# Altium PCB MAIN.PcbDoc
Units mm, origin at the board's own origin, x right, y up, seen from the top; angles counter-clockwise.
Board outline 51.97 x 56.64 mm, 4 copper layers (L1, L2, L3, L4), stack 0.603 mm thick; 28 components, 90 nets, 248 pads, 89 vias.
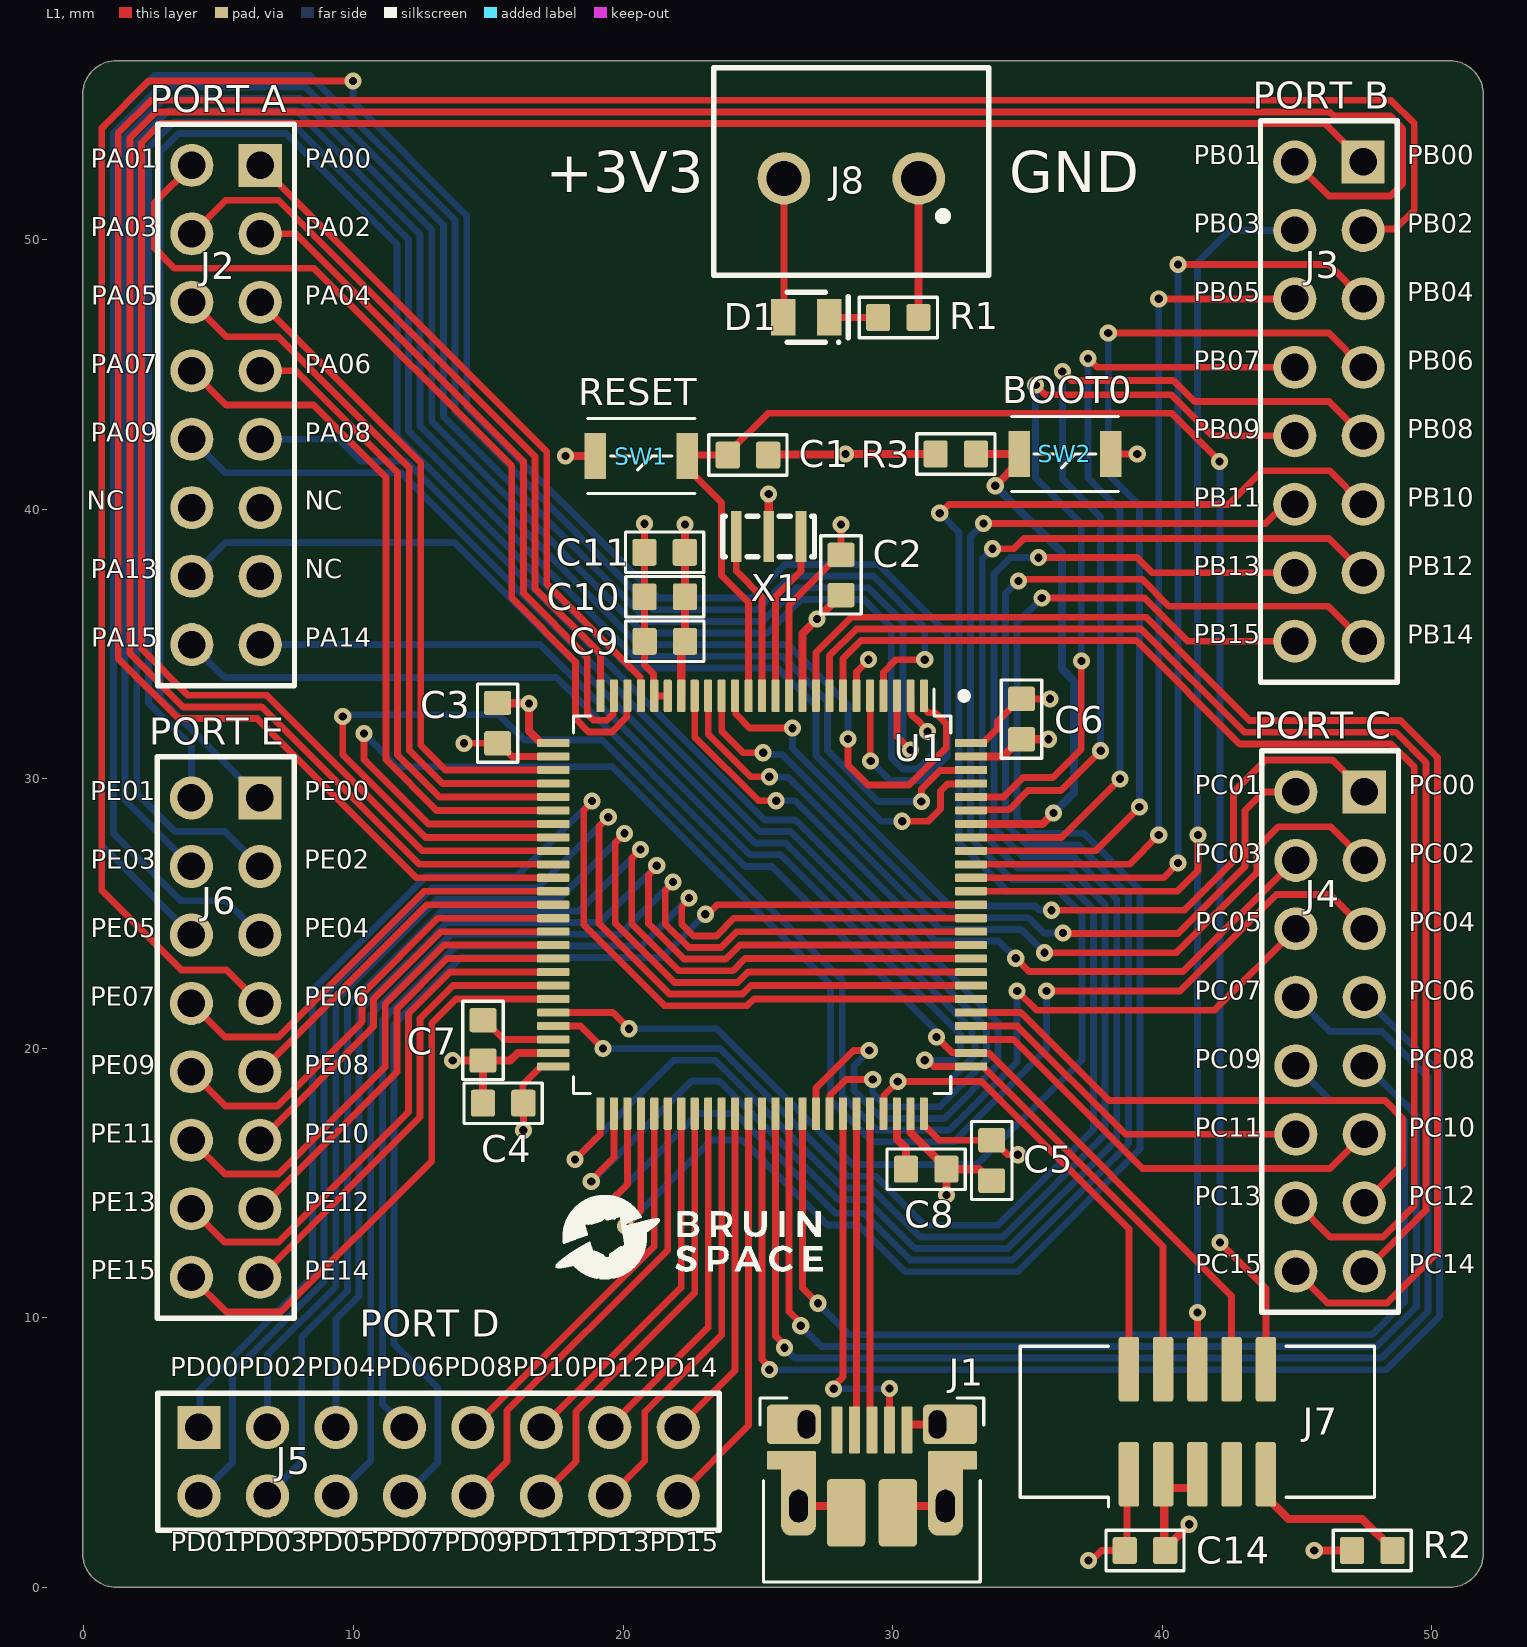
[diagram p0: L1 view]
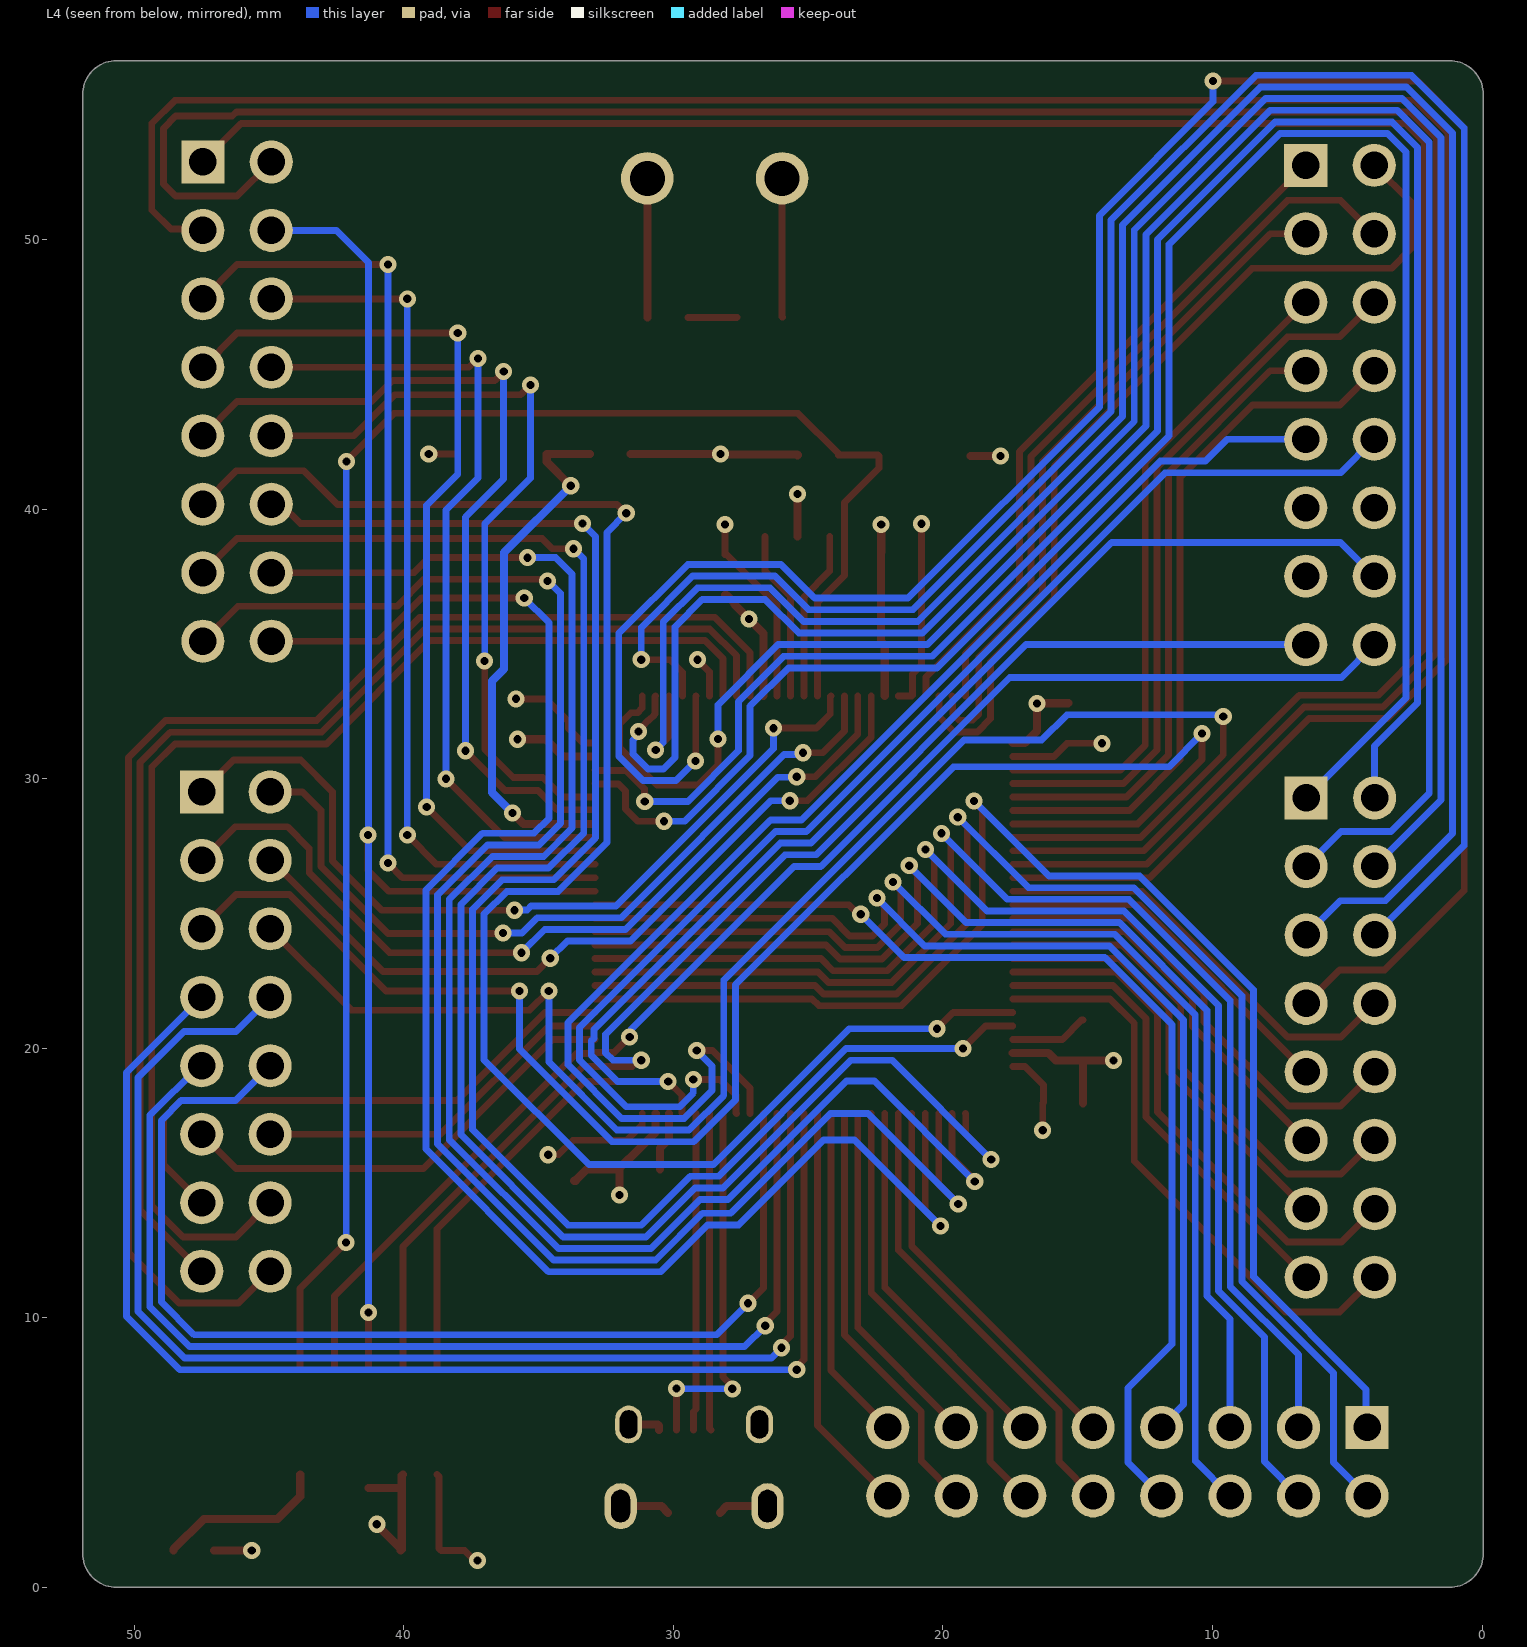
[diagram p1: L4 view, seen from below]
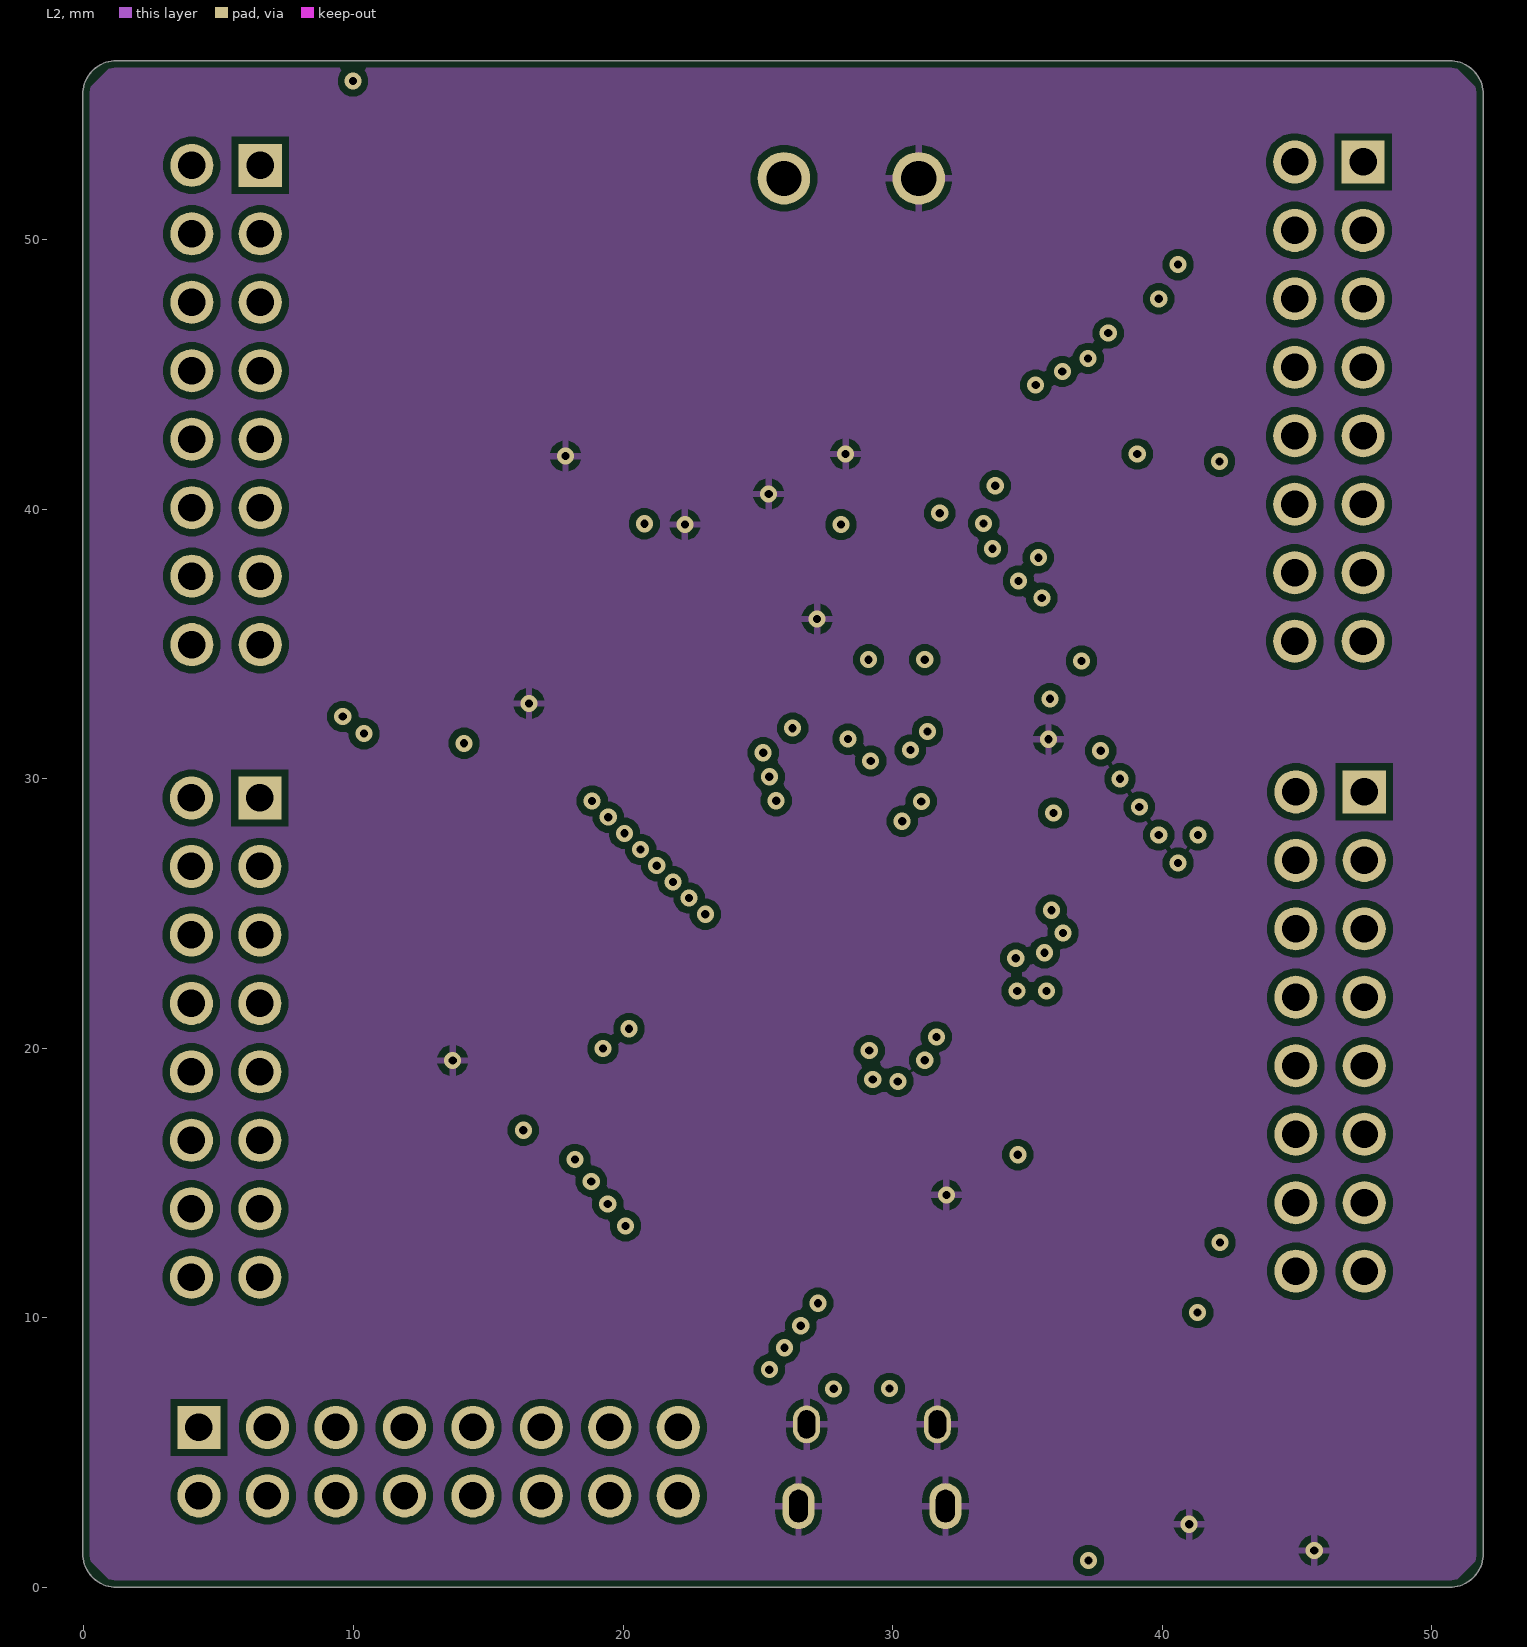
[diagram p2: L2]
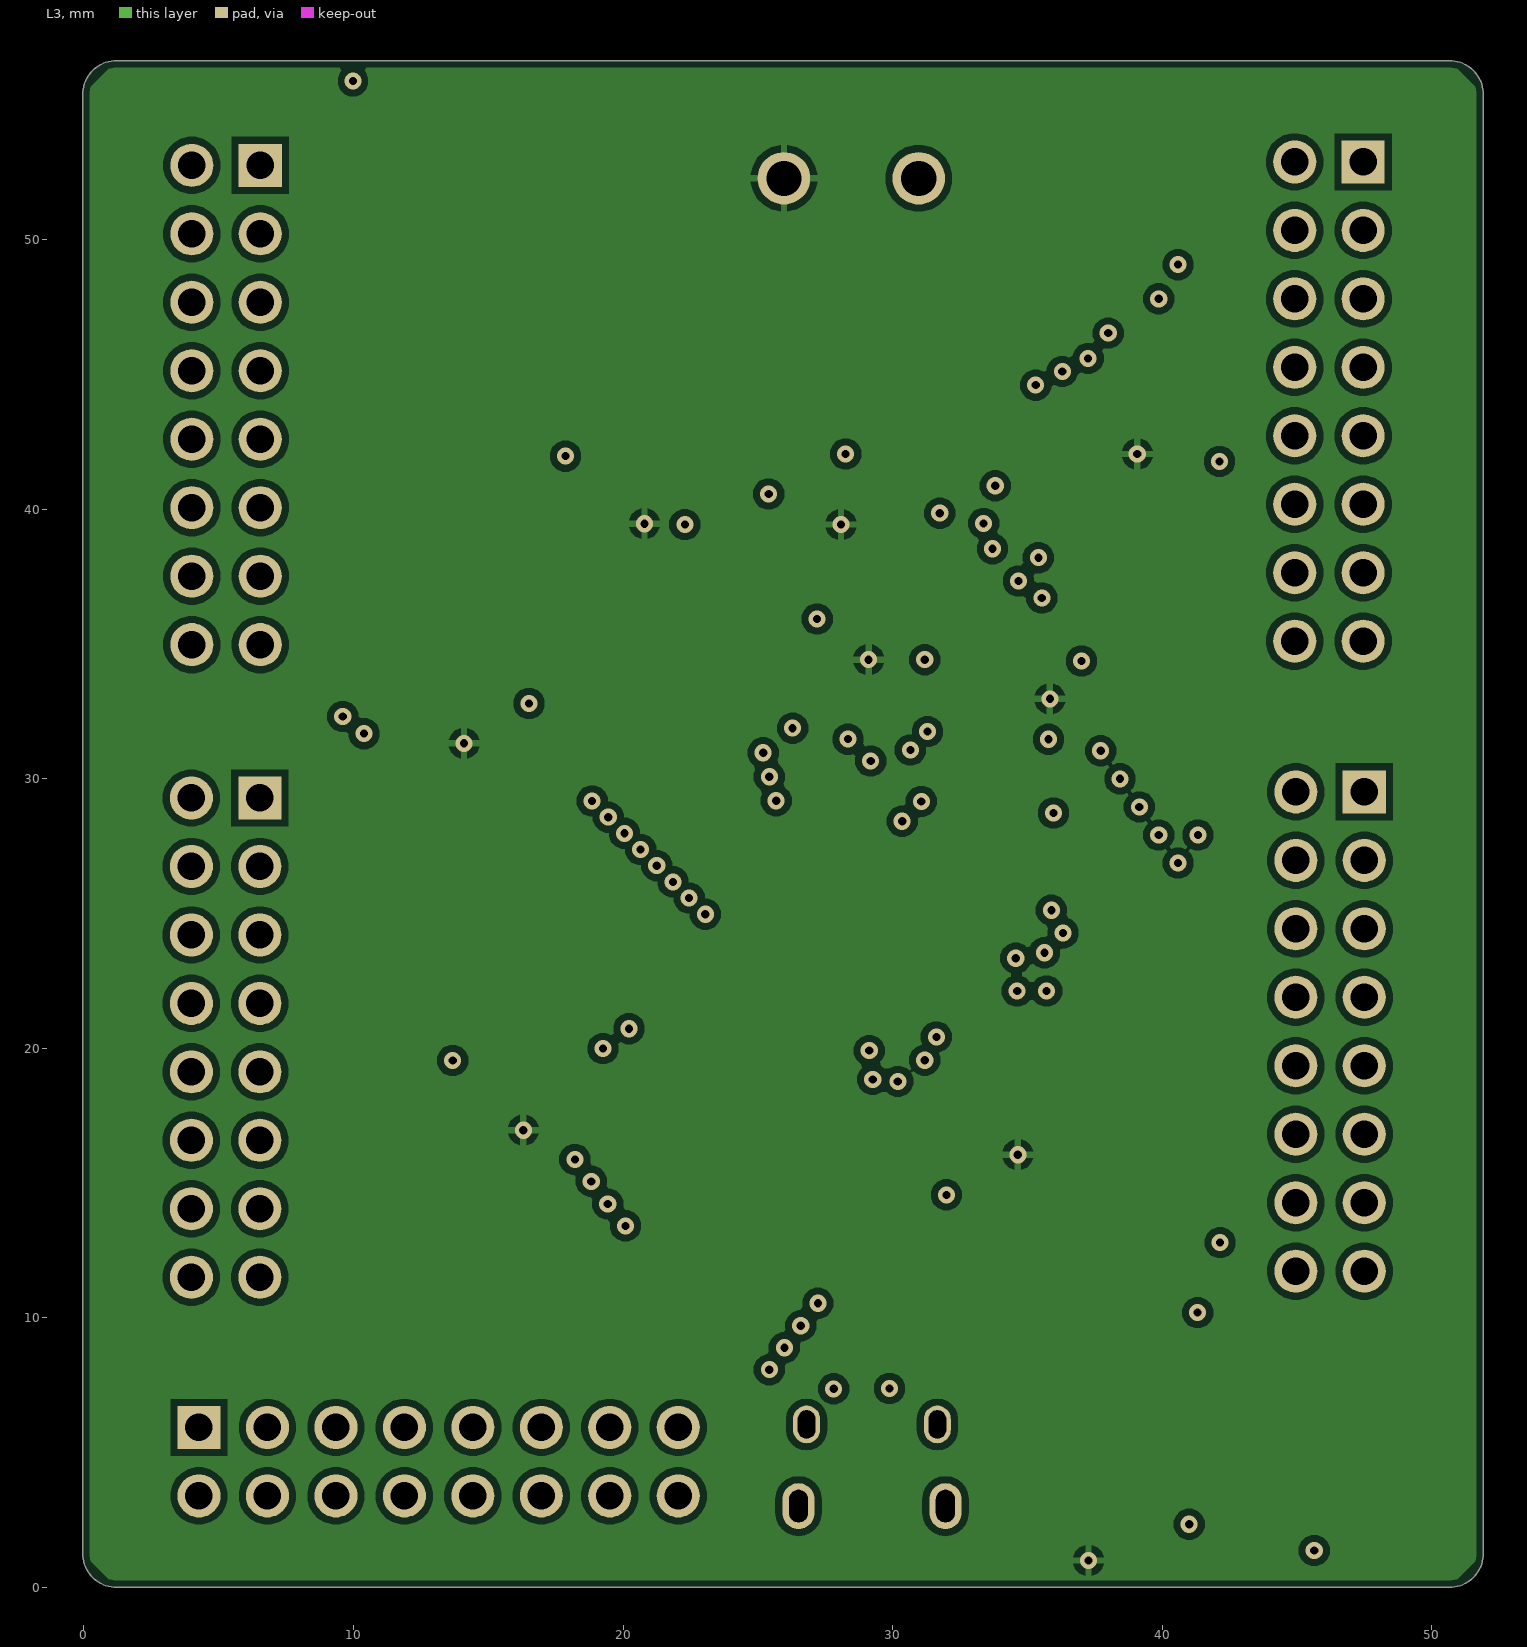
[diagram p3: L3]
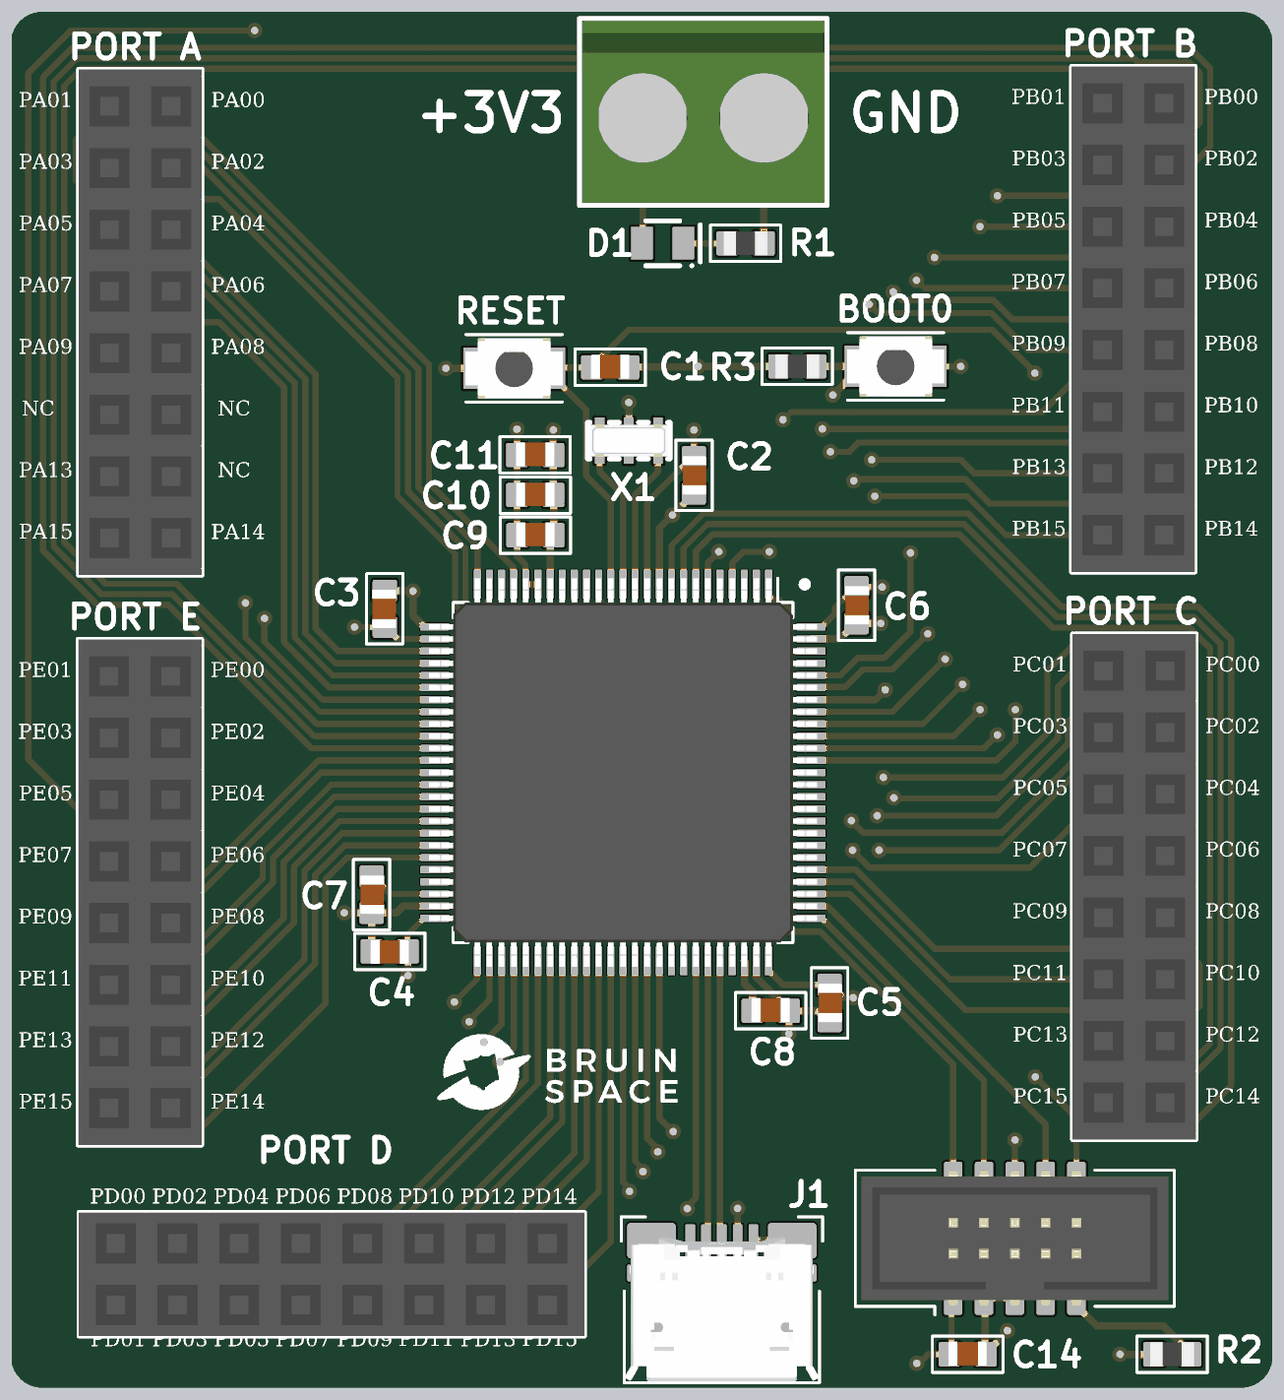
[diagram p4: 3D render of the assembled board from above, using the file's embedded part models]

## Layer stack, top to bottom
Top Solder: solder mask 0.0102, Solder Resist, Dk 3.5
L1: signal copper 0.035
Dielectric 2: prepreg 0.0711, PP-006, Dk 4.1
L2: signal copper 0.0356
Dielectric 1: dielectric 0.32, FR-4, Dk 4.8
L3: signal copper 0.0356
Dielectric 3: prepreg 0.0711, PP-006, Dk 4.1
L4: signal copper 0.035
Bottom Solder: solder mask 0.0102, Solder Resist, Dk 3.5

## Board outline
-0.051,1.27 ccw(c1.219,1.27) 1.219,0 50.648,0 ccw(c50.648,1.27) 51.918,1.27 51.918,55.372 ccw(c50.648,55.372) 50.648,56.642 1.219,56.642 ccw(c1.219,55.372) -0.051,55.372

## Design rules (kind name [scope] priority, off if disabled: settings)
BoardOutlineClearance [All] p1: gap=0.254 ignorepadtopadclearanceinfootprint=FALSE
Clearance [All] p1: gap=0.254 ignorepadtopadclearanceinfootprint=FALSE except(0.178: Track-Track Track-SMDPad SMDPad-SMDPad Via-Via)
DiffPairsRouting [All] p1: maxlimit=12.7 minlimit=0.203 mostfreqgap=0.203 toplayer_minwidth=0.203 toplayer_maxwidth=0.356 toplayer_prefwidth=0.305 midlayer1_minwidth=0.203 midlayer1_maxwidth=0.356 midlayer1_prefwidth=0.305 midlayer2_minwidth=0.203 midlayer2_maxwidth=0.356 midlayer2_prefwidth=0.305 bottomlayer_minwidth=0.203 bottomlayer_maxwidth=0.356 bottomlayer_prefwidth=0.305 maxuncoupledlength=12.7
MinimumSolderMaskSliver [All] p1: minsoldermaskwidth=0.076
PolygonConnect [All] p1: connectstyle=Relief reliefconductorwidth=0.254 reliefentries=4 polygonreliefangle="90 Angle" airgapwidth=0.254
RoutingVias [All] p1: holewidth=0.305 width=0.635 viastyle="Through Hole" minholewidth=0.254 minwidth=0.635 maxholewidth=0.305 maxwidth=0.635
SilkToSolderMaskClearance [IsPad] p1: minsilkscreentomaskgap=0.076 clearancetoexposedcopper=TRUE
SolderMaskExpansion [All] p1: expansion=0.102 istentingtop=FALSE
SupplyNets "Schematic Supply Nets" [InNet('GND')] p1: voltage=0.000
Width [All] p1: maxlimit=12.7 minlimit=0.152 preferedwidth=0.254 minimp=50.000000 maximp=50.000000 favimp=50.000000
27 further rules are at their usual default settings.

## Classes and differential pairs
component class STM32H743_Breakout_V2_TOP: D1 J8 R1
component class MCU1: C1 C2 C3 C4 C5 C6 C7 C8 C9 C10 C11 J1 R3 SW1 SW2 U1 X1
component class CON1: C14 J2 J3 J4 J5 J6 J7 R2
differential pair USB: +USB_P -USB_N

## Components (designator, comment, footprint, x,y, rotation, side; value= is the part's Value field where it differs from the comment)
C1 "C 0603 100nF 10% 50V X7R" C-0603 24.633,42.007 r180 top
C2 "C 0603 100nF 10% 50V X7R" C-0603 28.084,37.561 r90 top
C3 "C 0603 100nF 10% 50V X7R" C-0603 15.346,32.064 r270 top
C4 "C 0603 100nF 10% 50V X7R" C-0603 15.55,17.962 r0 top
C5 "C 0603 100nF 10% 50V X7R" C-0603 33.676,15.837 r90 top
C6 "C 0603 100nF 10% 50V X7R" C-0603 34.783,32.214 r90 top
C7 "C 0603 100nF 10% 50V X7R" C-0603 14.804,20.295 r90 top
C8 "C 0603 100nF 10% 50V X7R" C-0603 31.245,15.515 r180 top
C9 "C 0603 100nF 10% 50V X7R" C-0603 21.55,35.098 r180 top
C10 "C 0603 1µF 10% 50V X5R" C-0603 21.546,36.751 r180 top
C11 "C 0603 4.7µF 10% 16V X5R" C-0603 21.542,38.4 r180 top
C14 "C 0603 100nF 10% 50V X7R" C-0603 39.363,1.368 r180 top
D1 "KT-0805G" HubeiKENTO_0805 26.797,47.118 r180 top
J1 "10103594-0001LF" 10103594-0001LF 29.234,4.407 r0 top
J2 "SULLINS_PPPC082LFBN-RC" 2.54_08x02_female_header 5.272,43.866 r270 top
J3 "SULLINS_PPPC082LFBN-RC" 2.54_08x02_female_header 46.187,43.993 r270 top
J4 "SULLINS_PPPC082LFBN-RC" 2.54_08x02_female_header 46.228,20.622 r270 top
J5 "SULLINS_PPPC082LFBN-RC" 2.54_08x02_female_header 13.157,4.664 r0 top
J6 "SULLINS_PPPC082LFBN-RC" 2.54_08x02_female_header 5.255,20.396 r270 top
J7 "20021521-00010T1LF" 20021521-00010T1LF 41.306,6.143 r0 top
J8 "691137710002" 691137710002 28.469,52.275 r180 top
R1 "R 0603 100 1% 0.100W 200PPM" R-0603 30.211,47.113 r180 top
R2 "R 0603 100 1% 0.100W 100PPM" R-0603 47.792,1.368 r0 top
R3 "R 0603 10k 1% 0.100W 100PPM" R-0603 32.344,42.049 r0 top
SW1 "B3U-1000P" B3U-1000P 20.676,41.969 r180 top
SW2 "B3U-1000P" B3U-1000P 36.395,42.048 r180 top
U1 "STM32H743VIT6" "STM LQFP-100" 25.158,25.326 r180 top
X1 "MURATA_CSTNE16M0V53C000R0" MURATA_CSTNE16M0V53C000R0-Footprint-1 25.401,38.989 r180 top

## Footprints (in the part's own frame and the unit in brackets; to place one, negate y for a bottom-side part, rotate by r counter-clockwise, add the part's x,y. Pads: shape width x height; smd on the part's side, far side on the other; paste and mask are expansions set on the pad)
2.54_08x02_female_header [mm]
  rect 1.6x1.6 hole 1.02: 1(-8.89,1.27)
  round 1.6 hole 1.02: 2(-8.89,-1.27) 3(-6.35,1.27) 4(-6.35,-1.27) 5(-3.81,1.27) 6(-3.81,-1.27) 7(-1.27,1.27) 8(-1.27,-1.27) 9(1.27,1.27) 10(1.27,-1.27) 11(3.81,1.27) 12(3.81,-1.27) 13(6.35,1.27) 14(6.35,-1.27) 15(8.89,1.27) 16(8.89,-1.27)
  silkscreen extent -10.41,-2.54 10.41,2.54, body extent -10.41,-2.54 10.41,2.54, height 8.51
10103594-0001LF [mm] "USB 2.0 Micro-B, 5 leads, Through-Hole, Right Angle, 4 MH, 2 MP"
  rrect20% 0.4x1.75 smd mask+0.08: 1(-1.3,1.435) 2(-0.65,1.435) 3(0,1.435) 4(0.65,1.435) 5(1.3,1.435)
  rrect20% 2x1.46 smd mask+0.08: MH1(-2.9,1.64) MH4(2.9,1.64)
  oval 1x1.4 hole 0.65 slot 1.05 at 90 deg mask+0.08: MH1(-2.425,1.64) MH4(2.425,1.64)
  rrect20% 1.825x0.7 smd mask+0.08: MH2(-2.987,0.31) MH3(2.987,0.31)
  oval 1.2x1.7 hole 0.7 slot 1.2 at 90 deg mask+0.08: MH2(-2.725,-1.39) MH3(2.725,-1.39)
  rrect60% 1.3x3.15 smd mask+0.08: MH2(-2.725,-0.915) MH3(2.725,-0.915)
  rrect20% 1.425x2.5 smd mask+0.08: MP1(-0.962,-1.64) MP2(0.962,-1.64)
  silkscreen extent -4.15,-4.21 4.15,2.62, body extent -4.02,-4.15 4.02,1.88, height 2.9
20021521-00010T1LF [mm] "SWD Box Header 10-Pos SMD 1.27mm Pitch Shrouded"
  rrect25% 0.76x2.4 smd: 1(-2.54,-1.95) 2(-2.54,1.95) 3(-1.27,-1.95) 4(-1.27,1.95) 5(0,-1.95) 6(0,1.95) 7(1.27,-1.95) 8(1.27,1.95) 9(2.54,-1.95) 10(2.54,1.95)
  silkscreen extent -6.58,-3.15 6.58,2.8, body extent -6.32,-2.75 6.32,2.75, height 5.61
691137710002 [mm]
  round 1.95 hole 1.3: 1(-2.5,0) 2(2.5,0)
  silkscreen extent -5.1,-4.1 5.1,3.6, body extent -5,-4 5,3.5, height 11.5
B3U-1000P [mm] "SPST-NO Tactile Switch, SMD, 3.0x2.5x1.6(mm)"
  rect 0.8x1.7 smd: 1(1.7,0) 2(-1.7,0)
  silkscreen extent -1.98,-1.39 1.98,1.39, body extent -2,-1.25 2,1.25, height 1.75
C-0603 [mm] "Capacitor, 0603"
  rrect20% 0.9x1 smd: 1(-0.75,0) 2(0.75,0)
  silkscreen extent -1.45,-0.75 1.45,0.75, body extent -0.8,-0.53 0.8,0.48, height 0.81
HubeiKENTO_0805 [mm] "Molded Diode, 2-Leads, Body 2.00x1.25mm, IPC High Density"
  rect 0.9x1.35 smd: 1(-0.85,0) 2(0.85,0)
  silkscreen extent -1.55,-0.92 0.7,0.97, body extent -1,-0.63 1,0.63, height 0.8
MURATA_CSTNE16M0V53C000R0-Footprint-1 [mm]
  rect 0.4x1.9 smd: 1(-1.2,0) 2(0,0) 3(1.2,0)
  silkscreen extent -1.7,-0.75 1.7,0.75, body extent -1.6,-0.65 1.6,0.65, height 1
R-0603 [mm] "Resistor, 0603"
  rrect20% 0.9x1 smd: 1(-0.75,0) 2(0.75,0)
  silkscreen extent -1.45,-0.75 1.45,0.75, body extent -0.9,-0.5 0.9,0.5, height 0.57
"STM LQFP-100" [mm]
  rrect25% 0.3x1.2 smd mask+0.05: 1(-6,-7.75) 2(-5.5,-7.75) 3(-5,-7.75) 4(-4.5,-7.75) 5(-4,-7.75) 6(-3.5,-7.75) 7(-3,-7.75) 8(-2.5,-7.75) 9(-2,-7.75) 10(-1.5,-7.75) 11(-1,-7.75) 12(-0.5,-7.75) 13(0,-7.75) 14(0.5,-7.75) 15(1,-7.75) 16(1.5,-7.75) 17(2,-7.75) 18(2.5,-7.75) 19(3,-7.75) 20(3.5,-7.75) 21(4,-7.75) 22(4.5,-7.75) 23(5,-7.75) 24(5.5,-7.75) 25(6,-7.75) 51(6,7.75) 52(5.5,7.75) 53(5,7.75) 54(4.5,7.75) 55(4,7.75) 56(3.5,7.75) 57(3,7.75) 58(2.5,7.75) 59(2,7.75) 60(1.5,7.75) 61(1,7.75) 62(0.5,7.75) 63(0,7.75) 64(-0.5,7.75) 65(-1,7.75) 66(-1.5,7.75) 67(-2,7.75) 68(-2.5,7.75) 69(-3,7.75) 70(-3.5,7.75) 71(-4,7.75) 72(-4.5,7.75) 73(-5,7.75) 74(-5.5,7.75) 75(-6,7.75)
  rrect25% 1.2x0.3 smd mask+0.05: 26(7.75,-6) 27(7.75,-5.5) 28(7.75,-5) 29(7.75,-4.5) 30(7.75,-4) 31(7.75,-3.5) 32(7.75,-3) 33(7.75,-2.5) 34(7.75,-2) 35(7.75,-1.5) 36(7.75,-1) 37(7.75,-0.5) 38(7.75,0) 39(7.75,0.5) 40(7.75,1) 41(7.75,1.5) 42(7.75,2) 43(7.75,2.5) 44(7.75,3) 45(7.75,3.5) 46(7.75,4) 47(7.75,4.5) 48(7.75,5) 49(7.75,5.5) 50(7.75,6) 76(-7.75,6) 77(-7.75,5.5) 78(-7.75,5) 79(-7.75,4.5) 80(-7.75,4) 81(-7.75,3.5) 82(-7.75,3) 83(-7.75,2.5) 84(-7.75,2) 85(-7.75,1.5) 86(-7.75,1) 87(-7.75,0.5) 88(-7.75,0) 89(-7.75,-0.5) 90(-7.75,-1) 91(-7.75,-1.5) 92(-7.75,-2) 93(-7.75,-2.5) 94(-7.75,-3) 95(-7.75,-3.5) 96(-7.75,-4) 97(-7.75,-4.5) 98(-7.75,-5) 99(-7.75,-5.5) 100(-7.75,-6)
  silkscreen extent -7.62,-8 7,7, body extent -8,-8 8,8, height 1.46

## Part data
C1 C2 C3 C4 C5 C6 C7 C8 C9 C14: library part CMP-00008-4, "SMD Capacitor, Ceramic", Capacitance=100nF, Case/Package=0603, Dielectric=X7R, Dielectric Material=Ceramic, LCSC P/N=C14663, Max Operating Temperature=125°C, Min Operating Temperature=-55°C, Tolerance=10%, Voltage=50V, RoHS=Yes
C10: library part CMP-00039-2, "SMD Capacitor, Ceramic", Capacitance=1µF, Case/Package=0603, Dielectric=X5R, Dielectric Material=Ceramic, LCSC P/N=C15849, Max Operating Temperature=85°C, Min Operating Temperature=-55°C, Tolerance=10%, Voltage=50V, RoHS=Yes
C11: library part CMP-00010-4, "SMD Capacitor, Ceramic", Capacitance=4.7µF, Case/Package=0603, Dielectric=X5R, Dielectric Material=Ceramic, LCSC P/N=C19666, Max Operating Temperature=85°C, Min Operating Temperature=-55°C, Tolerance=10%, Voltage=16V, RoHS=Yes
D1: library part CMP-00081-2, "Green 520nm LED 2.8V 0805", Case/Package=0805, Color=Green, Forward Voltage=2.8V, LCSC P/N=C2297, Lens Color=Colorless, Max Operating Temperature=85°C, Maximum Forward Current=20mA, Min Operating Temperature=-40°C, Digikey P/N=846-SMLMN2ECTT86CCT-ND, Luminous Intensity=230mcd, Test Current=20mA, Wavelength=520nm
J1: library part CMP-00017-5, "USB 2.0 Micro-B, 5 leads, Through-Hole, Right Angle", Current Rating Per Contact=1.8A, Max Operating Temperature=80°C, Min Operating Temperature=-30°C, Voltage Rating (AC)=100V, Connector Type=Receptacle, Mount=Through-Hole, Number of Contacts=5, Orientation="Right Angle", RoHS=Yes
J2 J3 J4 J5 J6: library part CMP-00121-1, "2.54mm pitch 8x2 female pin header", Digikey P/N=S7111-ND
J7: library part CMP-00019-7, "1.27mm Pitch Micro Header, 2x5Pos SMD, Shrouded, SWD/JTAG", Current Rating Per Contact=1A, Max Operating Temperature=105°C, Min Operating Temperature=-40°C, Voltage Rating (AC)=125V, Connector Type="Header, SWD/JTAG", Digikey P/N=609-4054-ND, Mount=SMD, Number of Contacts=10, Orientation=Straight, RoHS=Yes, Voltage Rating (DC)=125V
J8: library part CMP-009-000000-2, "2 Position Wire to Board Terminal Block Horizontal with Board 0.197 (5.00mm) Through Hole", Package=None, Availability="In Stock", Check_prices=https://www.snapeda.com/parts/691137710002/Wurth+Electronics+Inc./view-part/?ref=eda, Component Type=Standard, Design Item ID=691137710002, MF="Wurth Electronics", MP=691137710002, Pin Count=2, Price=None, SnapEDA_Link=https://www.snapeda.com/parts/691137710002/Wurth+Electronics+Inc./view-part/?ref=snap, Source=691137710002.SchLib
R1: library part CMP-00095-2, "SMD Resistor, Thick Film", Case/Package=0603, LCSC P/N=C22775, Max Operating Temperature=155°C, Min Operating Temperature=-55°C, Power Rating=100mW, Resistance=100, Temperature Coefficient=200ppm, Tolerance=1%, Voltage Rating=75V, Composition="Thick Film", RoHS=Yes
R2: library part CMP-00095-1, "SMD Resistor, Thick Film", Case/Package=0603, LCSC P/N=C25804, Max Operating Temperature=155°C, Min Operating Temperature=-55°C, Power Rating=100mW, Resistance=10k, Temperature Coefficient=100ppm, Tolerance=1%, Voltage Rating=75V, Composition="Thick Film", RoHS=Yes
R3: library part CMP-00021-6, "SMD Resistor, Thick Film", Case/Package=0603, LCSC P/N=C25804, Max Operating Temperature=155°C, Min Operating Temperature=-55°C, Power Rating=100mW, Resistance=10k, Temperature Coefficient=100ppm, Tolerance=1%, Voltage Rating=75V, Composition="Thick Film", RoHS=Yes
SW1 SW2: library part CMP-00117-2, "Tactile Switch, SPST-NO, 0.05A @ 12VDC, SMD", Case/Package=SMD, LCSC P/N=C231329, Max Operating Temperature=70°C, Min Operating Temperature=-25°C, Voltage Rating (AC)=250V, Voltage Rating (DC)=12V, Digikey P/N=SW1020CT-ND, Mount=SMD, Pins=2, RoHS=Yes
U1: library part CMP-00101-4, "MCU 32-bit ARM Cortex M7 2MB Flash 3.3V 100-Pin LQFP"
X1: library part CMP-00120-1, "Ceramic Resonator 16MHz 15pF SMD", Capacitance=15p, Frequency=16MHz, LCSC P/N=C882606, Digikey P/N=490-17949-1-ND, Impedance=40, Pins=3

## Via types
v1: diameter 0.635, hole 0.305, L1 to L4, tented both sides, 89 vias

## Nets (pads, with @x,y where several pads share a name; then routed paths per layer and width w, separated by ;. In a path a pad name is that pad's centre, name@x,y a point inside that pad or via, vN(x,y) a via of type N, cw(c..) or ccw(c..) an arc to the next point about the centre after c; other vN are vias at no path point)
BOOT0: R3.2 SW2.1 U1.94 | length 20
  L1 w0.305: U1.94 35.565,28.326 v1(35.966,28.727) ; R3.2 34.694,42.049 34.695,41.756 v1(33.807,40.869)
  L4 w0.305: v1(33.807,40.869) 36.284,38.392 36.284,34.066 36.728,33.622 36.728,29.489 v1(35.966,28.727)
GND: C1.1 C2.1 C3.1 C4.1 C5.1 C6.1 C7.1 C8.1 C9.1 C10.1 C11.1 C14.1 J1.5 J1.MH1 J1.MH2 J1.MH3 J1.MH4 J1.MP1 J1.MP2 J7.3 J7.5 J8.1 R1.1 R2.1 R3.1 SW1.1 U1.10 U1.19 U1.26 U1.49 U1.74 U1.99 X1.2 | length 54
  L1 w0.305: v1(13.678,19.545) C7.1 ; C4.1 C4.1 14.802,19.543 C7.1 ; C3.1@15.346,32.814 15.357,32.803 16.499,32.803 v1(16.51,32.791) 16.51,31.779 16.963,31.326 U1.26 ; U1.49 16.092,19.826 15.811,19.545 C7.1 ; v1(17.865,41.969) SW1.1 ; U1.19 22.16,33.078 22.16,34.959 C9.1 22.298,35.1 22.298,36.749 C10.1 22.294,36.753 22.294,38.399 C11.1 v1(22.292,39.43) ; v1@25.392,40.572 v1(25.401,40.563) X1.2 ; C1.1@25.392,41.998 C1.1 25.403,42.028 28.236,42.028 v1(28.256,42.049) R3.1 ; J1.MH2@26.509,3.017 28.022,3.017 J1.MP1 ; U1.10 26.658,35.381 26.662,35.386 26.662,35.39 27.736,36.464 27.736,36.514 28.034,36.811 C2.1 ; J1.MP2 30.446,3.017 J1.MH3@31.959,3.017 ; J1.5 30.534,5.999 30.582,6.047 J1.MH4@31.659,6.047 ; U1.74 30.66,17.573 30.66,16.878 31.676,15.863 31.698,15.863 31.995,15.565 C8.1 ; R1.1 30.965,47.117 30.965,52.271 J8.1 ; v1(31.995,14.563) C8.1 ; U1.99 34.095,30.826 34.733,31.464 C6.1 v1(35.782,31.464) ; C5.1 33.626,15.087 33.198,15.515 C8.1 ; J7.3 40.075,4.155 J7.3@40.075,3.685 ; C14.1@40.075,1.407 J7.3@40.075,3.685 ; C14.1 40.113,1.418 41.001,2.307 v1(41.001,2.343) ; J7.5@41.306,3.685 J7.3@40.075,3.685 ; v1(45.641,1.368) R2.1
  other v1: 27.199,35.927
MCU_VCC: C2.2 C3.2 C4.2 C5.2 C6.2 C9.2 C10.2 C11.2 C14.2 D1.2 J7.1 J8.2 SW2.2 U1.6 U1.11 U1.20 U1.21 U1.27 U1.50 U1.75 U1.100 | length 41
  L1 w0.254: v1(14.101,31.314) 15.396,31.314 15.884,30.826 U1.27 ; v1(16.3,16.961) C4.2 16.276,17.987 16.276,18.644 16.958,19.326 U1.50 ; v1(20.792,39.461) C11.2 20.794,38.399 20.794,36.753 C10.2 20.798,36.749 20.798,35.1 C9.2 20.8,34.217 21.135,33.883 21.135,33.099 U1.21 U1.20 ; D1.2 25.969,47.14 J8.2 ; U1.11 26.158,36.431 26.162,36.436 26.162,36.44 C2.2@28.034,38.311 ; C2.2 v1(28.084,39.43) ; U1.6 28.658,33.967 v1(29.108,34.417) ; U1.75 31.158,17.126 31.181,17.103 31.218,17.103 31.734,16.587 C5.2 33.726,16.587 34.26,16.053 v1(34.646,16.053) ; U1.100 33.358,31.326 33.895,31.863 33.895,32.126 34.733,32.964 C6.2 v1(35.834,32.964) ; v1(37.268,0.996) 37.371,0.996 37.743,1.368 C14.2 38.69,1.445 38.69,4.117 J7.1 ; SW2.2 v1(39.076,42.048)
NetC7_2: C7.2 U1.48 | length 2.9
  L1 w0.254: C7.2 14.854,21.045 15.573,20.326 U1.48
NetC8_2: C8.2 U1.73 | length 2.2
  L1 w0.305: U1.73 30.16,17.573 30.16,16.626 30.493,16.294 30.493,15.517 C8.2
NetD1_1: D1.1 R1.2 | length 1.8
  L1 w0.254: D1.1 27.652,47.113 R1.2
NetJ7_9: J7.9 R2.2 | length 6.4
  L1 w0.305: J7.9 43.846,3.373 44.679,2.54 47.421,2.54 48.542,1.418 R2.2
NetU1_12: U1.12 X1.1 | length 6.3
  L1 w0.254: U1.12 25.658,36.758 26.601,37.701 X1.1
NetU1_13: U1.13 X1.3 | length 6.3
  L1 w0.254: X1.3 24.201,37.699 25.158,36.742 U1.13
NRST: C1.2 J7.10 SW1.2 U1.14 | length 65.4
  L1 w0.254: U1.14 24.658,36.531 23.647,37.541 23.647,40.247 22.376,41.519 SW1.2 22.414,42.007 C1.2 23.882,42.057 25.383,43.558 40.366,43.558 42.127,41.796 v1(42.127,41.772) ; v1(42.148,12.792) 43.846,11.094 J7.10
  L4 w0.254: v1@42.139,12.802 v1@42.139,41.785
PA0: J2.1 U1.22 | length 25.5
  L1 w0.254: J2.1 17.166,42.131 17.166,37.241 20.635,33.772 20.635,33.099 U1.22
PA1: J2.2 U1.23 | length 33.7
  L1 w0.254: J2.2 2.616,51.371 2.616,49.682 3.363,48.936 8.53,48.936 15.871,41.595 15.871,36.704 18.237,34.338 18.237,32.227 18.725,31.739 19.591,31.739 20.135,32.283 20.135,33.053 U1.23
PA2: J2.3 U1.24 | length 25.5
  L1 w0.254: J2.3 7.86,50.216 16.303,41.774 16.303,36.883 18.669,34.517 18.669,32.406 18.904,32.171 19.412,32.171 19.635,32.394 19.635,33.053 U1.24
PA3: J2.4 U1.25 | length 27.1
  L1 w0.254: J2.4 5.246,51.46 7.226,51.46 16.734,41.952 16.734,37.062 19.158,34.638 U1.25
PA4: J2.5 U1.28 | length 24.2
  L1 w0.254: J2.5 12.497,41.721 12.497,31.242 13.413,30.326 U1.28
PA5: J2.6 U1.29 | length 26.9
  L1 w0.254: J2.6 5.283,46.395 7.212,46.395 12.065,41.542 12.065,31.063 13.302,29.826 U1.29
PA6: J2.7 U1.30 | length 23.6
  L1 w0.254: J2.7 7.86,45.136 11.633,41.363 11.633,30.884 13.192,29.326 U1.30
PA7: J2.8 U1.31 | length 26.3
  L1 w0.254: J2.8 5.272,43.866 8.52,43.866 11.201,41.184 11.201,30.705 13.081,28.826 U1.31
PA8: J2.9 U1.67 | length 49.7
  L1 w0.254: U1.67 27.158,18.522 28.55,19.914 v1(29.134,19.914)
  L4 w0.254: J2.9 9.449,42.596 10.262,41.783 11.938,41.783 25.248,28.473 26.391,28.473 33.914,20.951 33.914,19.39 31.922,17.399 29.6,17.399 28.562,18.436 28.562,19.342 v1(29.134,19.914)
PA9: J2.10 U1.68 | length 47.9
  L1 w0.254: U1.68 27.681,17.599 27.681,18.258 28.27,18.847 v1(29.261,18.847)
  L4 w0.254: J2.10 5.246,41.351 11.759,41.351 25.069,28.042 26.212,28.042 33.482,20.772 33.482,19.569 31.744,17.831 29.779,17.831 29.261,18.349 v1(29.261,18.847)
PA13: J2.14 J7.2 U1.72 | length 58.7
  L1 w0.254: U1.72 29.681,17.599 29.681,18.258 v1(30.194,18.771) 33.299,18.771 38.766,13.304 J7.2
  L4 w0.254: J2.14 5.246,38.76 13.739,38.76 24.89,27.61 26.033,27.61 32.945,20.698 32.945,20.37 33.05,20.264 33.05,19.748 32.073,18.771 v1(30.194,18.771)
PA14: J2.15 J7.4 U1.76 | length 50.4
  L1 w0.254: v1(31.191,19.558) 31.294,19.558 31.526,19.326 U1.76 33.358,19.326 40.036,12.648 J7.4
  L4 w0.254: J2.15 16.913,34.976 24.711,27.178 25.854,27.178 32.513,20.519 32.513,19.822 32.249,19.558 v1(31.191,19.558)
PA15: J2.16 J7.8 U1.77 | length 51.4
  L1 w0.254: v1(31.623,20.422) 32.196,19.849 32.885,19.849 U1.77 32.931,19.803 33.59,19.803 42.576,10.817 J7.8
  L4 w0.254: J2.16 5.221,33.757 17.522,33.757 24.532,26.746 25.527,26.746 31.55,20.723 31.55,20.494 v1(31.623,20.422)
PB0: J3.1 U1.34 | length 83.4
  L1 w0.254: U1.34 12.554,27.326 6.784,33.096 3.861,33.096 2.134,34.823 2.134,53.594 2.845,54.305 46.035,54.305 J3.1
PB1: J3.2 U1.35 | length 92.7
  L1 w0.254: U1.35 12.444,26.826 6.605,32.664 3.682,32.664 1.702,34.645 1.702,53.773 2.666,54.737 46.213,54.737 46.366,54.585 48.463,54.585 48.92,54.127 48.92,52.07 48.463,51.613 46.187,51.613 J3.2
PB2: J3.3 U1.36 | length 93.4
  L1 w0.254: U1.36 12.333,26.326 6.426,32.233 3.503,32.233 1.27,34.466 1.27,53.952 2.487,55.169 48.49,55.169 49.352,54.306 49.352,51.105 48.638,50.39 47.504,50.39 J3.3
PB3: J3.4 J7.6 U1.89 | length 55.2
  L1 w0.254: U1.89 40.548,25.826 41.326,26.604 v1(41.326,27.915) ; J7.6 v1@41.306,10.205
  L4 w0.254: 41.307,25.832 41.307,49.155 42.494,50.343 J3.4 ; v1(41.315,10.196) 41.315,25.826
PB4: J3.5 U1.90 | length 37.5
  L1 w0.254: U1.90 40.042,26.326 v1(40.589,26.873) ; v1(40.589,49.073) 46.187,49.073 J3.5
  L4 w0.254: v1(40.589,26.873) v1(40.589,49.073)
PB5: J3.6 U1.91 | length 32.3
  L1 w0.254: U1.91 38.783,26.826 v1(39.871,27.914) ; v1@39.878,47.803 J3.6
  L4 w0.254: v1(39.871,27.914) v1(39.871,47.803)
PB6: J3.7 U1.92 | length 35
  L1 w0.254: U1.92 37.524,27.326 v1(39.153,28.955) ; v1(37.998,46.533) 46.187,46.533 J3.7
  L4 w0.254: v1(37.998,46.533) 37.998,41.3 39.153,40.146 v1(39.153,28.955)
PB7: J3.8 U1.93 | length 30.3
  L1 w0.254: U1.93 36.265,27.826 v1(38.435,29.996) ; v1(37.253,45.593) 37.262,45.593 37.592,45.263 J3.8
  L4 w0.254: v1(37.253,45.593) 37.253,41.157 38.435,39.975 v1(38.435,29.996)
PB8: J3.9 U1.95 | length 32.5
  L1 w0.254: U1.95 32.931,28.849 34.31,28.849 35.027,29.566 36.246,29.566 v1(37.717,31.037) ; v1(36.297,45.11) 36.627,44.78 40.412,44.78 41.2,43.993 46.187,43.993 J3.9
  L4 w0.254: v1(36.297,45.11) 36.297,41.123 37.717,39.702 v1(37.717,31.037)
PB9: J3.10 U1.96 | length 29.4
  L1 w0.254: U1.96 34.122,29.326 34.844,30.048 35.941,30.048 36.999,31.106 v1@36.999,34.366 ; v1(35.306,44.602) 35.662,44.247 40.335,44.247 41.859,42.723 J3.10
  L4 w0.254: v1(35.306,44.602) 35.306,41.148 36.999,39.455 v1@36.999,34.366
  other v1: 37.008,34.366
PB10: J3.11 U1.46 | length 64
  L1 w0.254: U1.46 19.619,21.326 v1(20.218,20.726) ; v1(31.75,39.853) 31.772,39.853 32.089,40.17 42.456,40.17 43.713,41.427 46.212,41.427 J3.11
  L4 w0.254: v1(20.218,20.726) 23.47,20.726 28.511,15.685 33.134,15.685 37.02,19.571 37.02,24.978 36.18,25.819 34.273,25.819 32.461,27.631 32.461,39.141 v1(31.75,39.853)
PB11: J3.12 U1.47 | length 62.1
  L1 w0.254: U1.47 18.417,20.826 v1(19.253,19.99) ; v1(33.376,39.472) 43.841,39.472 44.553,40.183 J3.12
  L4 w0.254: v1(19.253,19.99) 23.596,19.99 28.333,15.253 29.375,15.253 31.191,13.437 33.909,13.437 37.452,16.98 37.452,25.157 36.358,26.251 34.452,26.251 32.893,27.81 32.893,38.989 v1(33.376,39.472)
PB12: J3.13 U1.51 | length 66.9
  L1 w0.254: v1(18.212,15.875) 19.156,16.819 19.156,17.574 U1.51 ; v1(33.706,38.532) 34.487,38.532 34.868,38.913 46.187,38.913 J3.13
  L4 w0.254: v1(18.212,15.875) 21.895,19.558 23.417,19.558 28.154,14.821 29.196,14.821 31.012,13.005 34.088,13.005 37.884,16.801 37.884,25.336 36.537,26.683 34.631,26.683 33.325,27.989 33.325,38.151 v1(33.706,38.532)
PB13: J3.14 U1.52 | length 63.8
  L1 w0.254: v1(18.821,15.062) 18.821,15.113 19.658,15.95 U1.52 ; v1(35.408,38.202) 39.067,38.202 39.626,37.643 J3.14
  L4 w0.254: v1(18.821,15.062) 22.541,18.782 23.582,18.782 27.975,14.389 29.017,14.389 30.833,12.573 34.267,12.573 38.316,16.622 38.316,25.515 36.716,27.114 34.81,27.114 33.757,28.168 33.757,37.592 34.366,38.202 v1(35.408,38.202)
PB14: J3.15 U1.53 | length 66.3
  L1 w0.254: v1(19.431,14.224) 20.158,14.951 U1.53 ; v1(34.671,37.338) 34.734,37.401 39.257,37.401 40.26,36.398 46.162,36.398 J3.15
  L4 w0.254: v1(19.431,14.224) 22.783,17.576 24.178,17.576 27.871,13.883 28.913,13.883 30.655,12.141 34.446,12.141 38.748,16.443 38.748,25.694 36.895,27.546 34.989,27.546 34.188,28.346 34.188,36.881 34.646,37.338 v1(34.671,37.338)
PB15: J3.16 U1.54 | length 62.6
  L1 w0.254: v1(20.091,13.411) 20.658,13.978 U1.54 ; v1(35.535,36.703) 39.345,36.703 40.945,35.103 J3.16
  L4 w0.254: v1(20.091,13.411) 23.276,16.596 24.433,16.596 27.578,13.451 28.734,13.451 30.476,11.709 34.624,11.709 39.179,16.264 39.179,25.872 37.074,27.978 35.167,27.978 34.62,28.525 34.62,35.789 v1(35.535,36.703)
PC0: J4.1 U1.15 | length 31.8
  L1 w0.254: U1.15 24.181,33.053 24.181,32.394 24.698,31.877 v1(26.289,31.877) ; v1(35.89,25.121) 40.818,25.121 42.647,26.949 42.647,29.515 43.824,30.693 46.317,30.693 J4.1
  L4 w0.254: v1(26.289,31.877) 26.289,31.113 32.129,25.273 35.281,25.273 35.422,25.132 35.879,25.132 v1(35.89,25.121)
PC1: J4.2 U1.16 | length 29.1
  L1 w0.254: U1.16 23.658,31.767 24.462,30.963 v1(25.197,30.963) ; v1@36.322,24.257 40.589,24.257 43.078,26.746 43.078,28.829 43.761,29.512 J4.2
  L4 w0.254: v1(25.197,30.963) 25.263,30.896 25.895,30.896 31.95,24.841 35.052,24.841 35.611,24.282 v1(36.322,24.282)
PC2: J4.3 U1.17 | length 32.1
  L1 w0.254: U1.17 23.158,31.656 24.741,30.074 v1(25.425,30.074) ; v1(35.636,23.546) 40.538,23.546 43.51,26.518 43.51,27.407 44.323,28.219 46.251,28.219 J4.3
  L4 w0.254: v1(25.425,30.074) 25.442,30.057 26.124,30.057 31.771,24.409 34.773,24.409 v1(35.636,23.546)
PC3: J4.4 U1.18 | length 29.1
  L1 w0.254: U1.18 22.658,31.546 25.019,29.185 v1(25.679,29.185) ; v1(34.569,23.343) 35.065,22.847 40.779,22.847 44.903,26.972 J4.4
  L4 w0.254: v1(25.679,29.185) 26.385,29.185 31.592,23.978 33.934,23.978 v1(34.569,23.343)
PC4: J4.5 U1.32 | length 60.4
  L1 w0.254: v1(10.389,31.674) 10.389,30.713 12.776,28.326 U1.32 ; v1(35.712,22.123) 40.665,22.123 44.247,25.705 46.225,25.705 J4.5
  L4 w0.254: v1(10.389,31.674) 11.618,30.445 19.613,30.445 27.699,22.358 27.699,18.079 29.242,16.535 32.28,16.535 35.712,19.968 v1(35.712,22.123)
PC5: J4.6 U1.33 | length 60
  L1 w0.254: v1(9.601,32.309) 9.601,30.89 12.665,27.826 U1.33 ; v1(34.62,22.123) 35.331,21.412 41.939,21.412 J4.6
  L4 w0.254: v1(9.601,32.309) 9.665,32.372 15.405,32.372 16.335,31.443 19.225,31.443 28.131,22.537 28.131,18.258 29.421,16.967 32.101,16.967 34.62,19.486 v1(34.62,22.123)
PC6: J4.7 U1.63 | length 48.3
  L1 w0.254: U1.63 25.158,8.448 25.425,8.18 v1(25.425,8.077)
  L4 w0.254: v1(25.425,8.077) 48.314,8.077 50.292,10.055 50.292,19.102 47.502,21.892 J4.7
PC7: J4.8 U1.64 | length 48.4
  L1 w0.254: U1.64 25.658,9.319 25.984,8.993 v1(25.984,8.89)
  L4 w0.254: v1(25.984,8.89) 26.365,8.509 48.135,8.509 49.86,10.234 49.86,18.923 48.158,20.625 46.225,20.625 J4.8
PC8: J4.9 U1.65 | length 41.6
  L1 w0.254: U1.65 26.158,10.242 26.591,9.808 v1(26.591,9.705)
  L4 w0.254: v1(26.591,9.705) 27.356,8.941 47.956,8.941 49.428,10.413 49.428,17.502 47.578,19.352 J4.9
PC9: J4.10 U1.66 | length 41.6
  L1 w0.254: U1.66 26.658,11.112 v1(27.229,10.541)
  L4 w0.254: v1(27.229,10.541) 28.397,9.373 47.777,9.373 48.997,10.592 48.997,17.323 48.26,18.059 46.251,18.059 J4.10
PC10: J4.11 U1.78 | length 17.1
  L1 w0.254: U1.78 34.487,20.326 39.268,15.545 46.232,15.545 J4.11
PC11: J4.12 U1.79 | length 13.7
  L1 w0.254: U1.79 34.622,20.826 38.637,16.812 J4.12
PC12: J4.13 U1.80 | length 21.4
  L1 w0.254: U1.80 34.757,21.326 38.024,18.059 48.26,18.059 48.92,17.399 48.92,15.694 J4.13
PC13: J4.14 U1.7 | length 46.5
  L1 w0.254: U1.7 28.158,34.454 28.832,35.128 39.04,35.128 42.875,31.293 48.489,31.293 49.352,30.429 49.352,14.173 48.184,13.005 46.225,13.005 J4.14
PC14: J4.15 U1.8 | length 45.9
  L1 w0.254: U1.8 27.658,34.565 28.653,35.56 39.219,35.56 43.054,31.725 48.667,31.725 49.784,30.608 49.784,13.994 47.521,11.732 J4.15
PC15: J4.16 U1.9 | length 52.2
  L1 w0.254: U1.9 27.158,34.676 28.474,35.992 39.398,35.992 43.233,32.156 48.846,32.156 50.216,30.787 50.216,12.421 48.346,10.551 46.139,10.551 J4.16
PD0: J5.1 U1.81 | length 51.7
  L1 w0.254: v1(18.851,29.174) 18.851,29.144 18.542,28.835 18.542,24.581 21.542,21.58 24.606,21.58 24.852,21.826 U1.81
  L4 w0.254: J5.1 4.3,5.967 4.3,7.348 8.479,11.527 8.479,22.169 12.7,26.391 16.067,26.391 v1(18.851,29.174)
PD1: J5.2 U1.82 | length 52.9
  L1 w0.254: v1(19.451,28.574) 19.101,28.224 19.101,24.633 21.721,22.012 24.427,22.012 24.741,22.326 U1.82
  L4 w0.254: J5.2 5.512,4.639 5.512,7.949 8.911,11.348 8.911,21.947 12.922,25.959 16.835,25.959 v1(19.451,28.574)
PD2: J5.3 U1.83 | length 47.9
  L1 w0.254: v1(20.051,27.974) 19.71,27.634 19.71,24.634 21.9,22.444 24.248,22.444 24.63,22.826 U1.83
  L4 w0.254: J5.3 6.807,8.634 9.342,11.169 9.342,21.768 13.101,25.527 17.603,25.527 v1(20.051,27.974)
PD3: J5.4 U1.84 | length 49.1
  L1 w0.254: v1(20.651,27.374) 20.651,27.366 20.32,27.035 20.32,24.635 22.079,22.876 24.07,22.876 24.52,23.326 U1.84
  L4 w0.254: J5.4 8.077,4.664 8.077,9.293 9.774,10.99 9.774,21.589 13.28,25.095 18.372,25.095 v1(20.651,27.374)
PD4: J5.5 U1.85 | length 44.1
  L1 w0.254: v1(21.251,26.774) 21.251,26.743 20.943,26.435 20.943,24.623 22.258,23.308 23.818,23.308 24.336,23.826 U1.85
  L4 w0.254: J5.5 9.347,9.952 10.206,10.811 10.206,21.41 13.459,24.663 19.14,24.663 v1(21.251,26.774)
PD5: J5.6 U1.86 | length 45.3
  L1 w0.254: v1(21.851,26.174) 21.851,26.122 21.563,25.835 21.563,24.613 22.437,23.739 23.639,23.739 24.225,24.326 U1.86
  L4 w0.254: J5.6 10.638,4.685 10.638,21.232 13.638,24.232 19.908,24.232 v1(21.851,26.174)
PD6: J5.7 U1.87 | length 41
  L1 w0.254: v1(22.451,25.574) 22.451,25.512 22.174,25.235 22.174,24.613 22.616,24.171 23.46,24.171 24.115,24.826 U1.87
  L4 w0.254: J5.7 11.887,5.97 11.07,6.787 11.07,21.053 13.817,23.8 20.676,23.8 v1(22.451,25.574)
PD7: J5.8 U1.88 | length 41.9
  L1 w0.254: v1(23.051,24.974) 23.154,24.974 23.505,25.326 U1.88
  L4 w0.254: J5.8 13.132,4.639 13.132,7.391 11.501,9.022 11.501,20.874 13.995,23.368 21.444,23.368 v1(23.051,24.974)
PD8: J5.9 U1.55 | length 14.4
  L1 w0.254: J5.9 21.158,12.665 U1.55
PD9: J5.10 U1.56 | length 17.2
  L1 w0.254: J5.10 15.699,4.666 15.699,6.555 21.658,12.514 U1.56
PD10: J5.11 U1.57 | length 13.8
  L1 w0.254: J5.11 22.158,11.125 U1.57
PD11: J5.12 U1.58 | length 16.5
  L1 w0.254: J5.12 18.252,4.679 18.252,6.517 22.658,10.923 U1.58
PD12: J5.13 U1.59 | length 13.2
  L1 w0.254: J5.13 19.507,5.995 23.158,9.646 U1.59
PD13: J5.14 U1.60 | length 15.9
  L1 w0.254: J5.14 20.804,4.692 20.804,6.504 23.658,9.358 U1.60
PD14: J5.15 U1.61 | length 12.5
  L1 w0.254: J5.15 24.158,8.045 U1.61
PD15: J5.16 U1.62 | length 15.3
  L1 w0.254: J5.16 24.658,6.005 U1.62
PE0: J6.1 U1.97 | length 72.6
  L1 w0.254: v1(30.353,28.423) 31.315,28.423 31.775,28.883 31.775,29.54 32.038,29.803 32.885,29.803 U1.97
  L4 w0.254: J6.1 2.821,32.991 2.821,53.245 3.512,53.937 7.499,53.937 11.608,49.828 11.608,42.724 20.219,34.112 25.73,34.112 27.153,32.69 27.153,30.86 29.59,28.423 v1(30.353,28.423)
PE1: J6.2 U1.98 | length 72.1
  L1 w0.254: v1(31.064,29.159) 31.076,29.171 31.076,29.627 31.752,30.303 32.885,30.303 U1.98
  L4 w0.254: J6.2 3.985,31.216 2.389,32.812 2.389,53.424 3.333,54.369 7.678,54.369 12.04,50.007 12.04,42.903 20.398,34.544 25.909,34.544 27.584,32.869 27.584,31.039 29.464,29.159 v1(31.064,29.159)
PE2: J6.3 U1.1 | length 79.2
  L1 w0.254: v1(28.346,31.471) 28.346,30.508 29.086,29.769 30.607,29.769 31.991,31.153 31.991,32.039 31.582,32.448 31.336,32.448 31.158,32.626 U1.1
  L4 w0.254: J6.3 5.23,28.042 3.378,28.042 1.957,29.463 1.957,53.603 3.155,54.801 7.857,54.801 12.471,50.186 12.471,43.082 20.577,34.976 26.113,34.976 28.346,32.743 v1(28.346,31.471)
PE3: J6.4 U1.2 | length 79.6
  L1 w0.254: U1.2 30.681,33.053 30.681,32.413 30.703,32.39 30.703,32.372 30.904,32.171 30.923,32.171 v1@31.191,31.902
  L4 w0.254: J6.4 1.525,29.206 1.525,53.782 2.976,55.232 8.036,55.232 12.903,50.365 12.903,43.26 20.756,35.408 25.349,35.408 26.594,36.652 28.931,36.652 29.947,35.636 29.947,30.788 30.368,30.366 30.947,30.366 31.496,30.915 31.496,31.443 31.191,31.748 v1@31.191,31.799
  other v1: 31.293,31.749
PE4: J6.5 U1.3 | length 83.5
  L1 w0.254: U1.3 30.158,31.564 v1(30.658,31.064)
  L4 w0.254: J6.5 5.255,25.476 3.585,25.476 1.093,27.968 1.093,53.961 2.797,55.664 8.215,55.664 13.335,50.544 13.335,43.439 20.935,35.839 25.17,35.839 26.415,37.084 29.109,37.084 30.378,35.815 30.378,31.344 v1(30.658,31.064)
PE5: J6.6 U1.4 | length 80.1
  L1 w0.254: U1.4 29.658,33.951 30.124,34.417 v1(31.191,34.417)
  L4 w0.254: J6.6 0.662,27.53 0.662,54.139 2.618,56.096 8.394,56.096 13.767,50.723 13.767,43.618 21.114,36.271 24.991,36.271 26.236,37.516 29.288,37.516 31.191,35.613 v1(31.191,34.417)
PE6: J6.7 U1.5 | length 92.6
  L1 w0.254: J6.7 5.28,22.911 3.61,22.911 0.662,25.86 0.662,54.139 2.402,55.88 v1(9.982,55.88) ; U1.5 29.171,33.063 29.171,30.671 v1(29.185,30.658)
  L4 w0.254: v1(9.982,55.88) 9.982,55.118 14.199,50.902 14.199,43.797 21.293,36.703 24.758,36.703 26.002,37.948 29.467,37.948 32.029,35.385 32.029,30.837 31.126,29.934 29.909,29.934 v1(29.185,30.658)
PE7: J6.8 U1.37 | length 16.2
  L1 w0.254: J6.8 5.228,20.423 7.211,20.423 12.614,25.826 U1.37
PE8: J6.9 U1.38 | length 13.5
  L1 w0.254: J6.9 12.725,25.326 U1.38
PE9: J6.10 U1.39 | length 17.4
  L1 w0.254: J6.10 5.255,17.856 7.184,17.856 10.312,20.984 10.312,22.003 13.136,24.826 U1.39
PE10: J6.11 U1.40 | length 14.7
  L1 w0.254: J6.11 10.744,20.806 10.744,21.824 13.246,24.326 U1.40
PE11: J6.12 U1.41 | length 18.8
  L1 w0.254: J6.12 5.23,15.342 7.21,15.342 11.176,19.308 11.176,21.645 13.357,23.826 U1.41
PE12: J6.13 U1.42 | length 16.1
  L1 w0.254: J6.13 11.608,19.129 11.608,21.466 13.467,23.326 U1.42
PE13: J6.14 U1.43 | length 20.2
  L1 w0.254: J6.14 5.215,12.816 7.224,12.816 12.04,17.632 12.04,21.287 13.578,22.826 U1.43
PE14: J6.15 U1.44 | length 17.5
  L1 w0.254: J6.15 12.471,17.453 12.471,21.108 13.689,22.326 U1.44
PE15: J6.16 U1.45 | length 21.8
  L1 w0.254: J6.16 5.28,10.211 7.29,10.211 12.903,15.824 12.903,20.93 13.799,21.826 U1.45
USB_ID: J1.4 U1.69 | length 14
  L1 w0.254: v1(27.813,7.366) 27.813,7.469 28.158,7.814 U1.69 ; J1.4 v1(29.884,7.378)
  L4 w0.254: v1(27.813,7.366) 27.819,7.372 29.878,7.372 v1(29.884,7.378)
USB_N: J1.2 U1.70 | length 11.8
  L1 w0.254: J1.2@28.609,5.842 28.658,5.89 U1.70
USB_P: J1.3 U1.71 | length 11.8
  L1 w0.254: U1.71 29.158,6.618 29.259,6.517 J1.3@29.259,5.842
pads on no net: J1.1 J2.11 J2.12 J2.13 J7.7

## Polygon pours and split planes (outlines as drawn)
GND on L2 "NONET_L-01_P-001" (solid, pour order 1): -0.051,55.372 1.219,56.642 50.648,56.642 51.918,55.372 51.918,1.27 50.648,0 1.219,0 -0.051,1.27
MCU_VCC on L3 "NONET_L-01_P-001" (solid, pour order 0): -0.051,55.372 1.219,56.642 50.648,56.642 51.918,55.372 51.918,1.27 50.648,0 1.219,0 -0.051,1.27

## Silkscreen, mask and mechanical layers (free items; w line width, h text height)
Top Overlay:
  drawing of 22 lines, arcs and shapes, not listed
  text "PORT B" at 43.354,54.861 h1
  text "PORT A" at 2.439,54.734 h1
  text "PB01" at 41.169,52.556 h1.2
  text "PB00" at 49.097,52.556 h1.2
  text "PA01" at 0.254,52.429 h1.2
  text "PA00" at 8.182,52.429 h1.2
  text "+3V3" at 17.129,51.763 h1.52
  text "GND" at 34.323,51.763 h1.52
  text "PB03" at 41.176,50.016 h1.2
  text "PB02" at 49.097,50.016 h1.2
  text "PA03" at 0.26,49.889 h1.2
  text "PA02" at 8.182,49.889 h1.2
  text "PB05" at 41.18,47.476 h1.2
  text "PB04" at 49.097,47.476 h1.2
  text "PA05" at 0.265,47.349 h1.2
  text "PA04" at 8.182,47.349 h1.2
  text "PB07" at 41.167,44.936 h1.2
  text "PB06" at 49.097,44.936 h1.2
  text "PA07" at 0.251,44.809 h1.2
  text "PA06" at 8.182,44.809 h1.2
  text "BOOT0" at 34.062,43.939 h1
  text "RESET" at 18.343,43.86 h1
  text "PB09" at 41.167,42.396 h1.2
  text "PB08" at 49.097,42.396 h1.2
  text "PA09" at 0.251,42.269 h1.2
  text "PA08" at 8.182,42.269 h1.2
  text "PB11" at 41.169,39.855 h1.2
  text "PB10" at 49.097,39.856 h1.2
  text "NC" at 0.11,39.729 h1.2
  text "NC" at 8.182,39.729 h1.2
  text "PB13" at 41.176,37.316 h1.2
  text "PB12" at 49.097,37.312 h1.2
  text "PA13" at 0.26,37.189 h1.2
  text "NC" at 8.182,37.189 h1.2
  text "PB15" at 41.18,34.779 h1.2
  text "PB14" at 49.097,34.775 h1.2
  text "PA15" at 0.265,34.652 h1.2
  text "PA14" at 8.182,34.648 h1.2
  text "PORT C" at 43.396,31.49 h1
  text "PORT E" at 2.423,31.264 h1
  text "PC01" at 41.211,29.185 h1.2
  text "PC00" at 49.138,29.185 h1.2
  text "PE01" at 0.237,28.959 h1.2
  text "PE00" at 8.165,28.959 h1.2
  text "PC03" at 41.217,26.645 h1.2
  text "PC02" at 49.138,26.645 h1.2
  text "PE03" at 0.244,26.419 h1.2
  text "PE02" at 8.165,26.419 h1.2
  text "PC05" at 41.222,24.105 h1.2
  text "PC04" at 49.138,24.105 h1.2
  text "PE05" at 0.248,23.879 h1.2
  text "PE04" at 8.165,23.879 h1.2
  text "PC07" at 41.208,21.565 h1.2
  text "PC06" at 49.138,21.565 h1.2
  text "PE07" at 0.235,21.339 h1.2
  text "PE06" at 8.165,21.339 h1.2
  text "PC09" at 41.208,19.025 h1.2
  text "PC08" at 49.138,19.025 h1.2
  text "PE09" at 0.235,18.799 h1.2
  text "PE08" at 8.165,18.799 h1.2
  text "PC11" at 41.211,16.485 h1.2
  text "PC10" at 49.138,16.485 h1.2
  text "PE11" at 0.237,16.258 h1.2
  text "PE10" at 8.165,16.259 h1.2
  text "PC13" at 41.217,13.945 h1.2
  text "PC12" at 49.138,13.944 h1.2
  text "PE13" at 0.244,13.719 h1.2
  text "PE12" at 8.165,13.715 h1.2
  text "PC15" at 41.222,11.405 h1.2
  text "PC14" at 49.138,11.405 h1.2
  text "PE15" at 0.248,11.183 h1.2
  text "PE14" at 8.165,11.178 h1.2
  text "PORT D" at 10.223,9.293 h1
  text "PD00" at 3.203,7.583 h1.2
  text "PD02" at 5.75,7.583 h1.2
  text "PD04" at 8.274,7.583 h1.2
  text "PD06" at 10.827,7.583 h1.2
  text "PD08" at 13.37,7.583 h1.2
  text "PD10" at 15.903,7.583 h1.2
  text "PD12" at 18.45,7.574 h1.2
  text "PD14" at 20.974,7.574 h1.2
  text "PD01" at 3.213,1.092 h1.2
  text "PD03" at 5.757,1.092 h1.2
  text "PD05" at 8.299,1.092 h1.2
  text "PD07" at 10.832,1.092 h1.2
  text "PD09" at 13.372,1.092 h1.2
  text "PD11" at 15.913,1.098 h1.2
  text "PD13" at 18.457,1.092 h1.2
  text "PD15" at 20.999,1.098 h1.2
Mechanical 1:
  the board outline again, w0.2